# EAGLE board LB_BIT_w21_SUM-v03(2_1x) (EAGLE 6.5.0)

Size 299.64 x 153.09 mm. Coordinates in mm from the lower left corner, seen from the top.
Outline: 139.64,0 299.64,0 299.64,100 139.64,100 139.64,0
Copper layers (1*16): Top 0.035mm / dielectric 1.5mm / Bottom 0.035mm
Design rules "default": minimum track width 10mil, minimum drill 24mil, track to track 8mil, track to pad 8mil, pad to pad 8mil, via to via 8mil, smd to smd 8mil, copper to edge 40mil, drill to drill 8mil, minimum pad ring 10mil, minimum via ring 8mil, stop-mask expansion 4mil, vias tented up to drill 0mil, thermal gap 10mil

## Footprints (pad centres in the part's own frame; a part is rotated, then mirrored left to right if it is on the bottom)
BITSNAP_V03_FEMALE = drill 1: GND 3.91,3.33; SIG 6.45,3.33; VCC 8.99,3.33 | hole 1.4: 1.63,2.5; 11.27,2.5
BITSNAP_V03_MALE = drill 1: GND1 8.98,2.56; SIG1 6.44,2.56; VCC1 3.9,2.56 | hole 1.4: 11.27,2.5; 1.63,2.5
CAP-0603 = smd 1.1 x 1: 1 -0.85,0; 2 0.85,0
RES-0603 = smd 1.1 x 1: 1 -0.85,0; 2 0.85,0
SOD-923 = smd 0.4 x 0.5: 1 -0.5,0; 2 0.5,0
SOT23-5 = smd 0.55 x 1.2: 1 -0.95,-1.3; 2 0,-1.3; 3 0.95,-1.3; 4 0.95,1.3; 5 -0.95,1.3

## Placement (x,y rotation side)
FRAME1  FRAME-LETTER  [FABDWG01]  53.28,77.47 0 top
U$1  OSHWCREDIT  [OSHWCREDIT]  68.52,147.32 0 top
U$2  OSHW-LOGOL  [OSHW-LOGO-L]  -5.14,148.59 0 top  (outside the outline)
W21BSF1  BITSNAP_V03_FEMALE  [BITSNAP_V03_FEMALE]  109.16,148.59 0 top
W21BSM1  BITSNAP_V03_MALE  [BITSNAP_V03_MALE]  25.34,148.59 0 top
W21BSM2  BITSNAP_V03_MALE  [BITSNAP_V03_MALE]  3.75,148.59 0 top
W21C2  0.1u  [CAP-0603]  -41.97,147.32 0 top  (outside the outline)
W21C3  0.1u  [CAP-0603]  -45.78,147.32 0 top  (outside the outline)
W21C7  0.1u  [CAP-0603]  -49.59,147.32 0 top  (outside the outline)
W21R1  100k  [RES-0603]  -53.4,147.32 0 top  (outside the outline)
W21R4  100k  [RES-0603]  -57.21,147.32 0 top  (outside the outline)
W21R5  100k  [RES-0603]  124.4,170.18 0 top  (outside the outline)
W21R6  100k  [RES-0603]  120.59,170.18 0 top  (outside the outline)
W21R8  200k  [RES-0603]  116.78,170.18 0 top  (outside the outline)
W21R9  200k  [RES-0603]  112.97,170.18 0 top  (outside the outline)
W21R10  200k  [RES-0603]  109.16,170.18 0 top  (outside the outline)
W21R13  100k  [RES-0603]  105.35,170.18 0 top  (outside the outline)
W21TVS1  ESD9B5.0ST5G  [SOD-923]  -28,147.32 0 top  (outside the outline)
W21TVS2  ESD9B5.0ST5G  [SOD-923]  -33.08,147.32 0 top  (outside the outline)
W21TVS3  ESD9B5.0ST5G  [SOD-923]  -38.16,147.32 0 top  (outside the outline)
W21U1  LV321SOT23-5  [SOT23-5]  -12.76,147.32 0 top  (outside the outline)
W21U3  LV321SOT23-5  [SOT23-5]  -17.84,147.32 0 top  (outside the outline)
W21U5  LV321SOT23-5  [SOT23-5]  -22.92,147.32 0 top  (outside the outline)

## Library data of the parts
FRAME1 U$1 U$2 W21C2 W21C3 W21C7 W21R1 W21R4-W21R6 W21R8-W21R10 W21R13 W21U1 W21U3 W21U5 = LITTLEBITS
W21BSF1 W21BSM1 W21BSM2 = bitSnap
W21TVS1-W21TVS3 = LITTLEBITS; IEC_ESD_PROT: +/-18kV; LB_PN: ?; V_CLAMP: ?; V_OPERATION: 5V

## Nets
GND: W21BSF1.GND W21BSM1.GND1 W21BSM2.GND1 W21C2.2 W21C3.2 W21C7.2 W21R9.2 W21R10.2 W21R13.2 W21TVS1.1 W21TVS2.1 W21TVS3.1 W21U1.2 W21U3.2 W21U5.2
N$2: W21BSM2.SIG1 W21R4.2 W21TVS3.2
N$3: W21R1.1 W21R9.1 W21U1.1
N$4: W21R5.1 W21R6.1 W21U5.1
N$5: W21BSM1.SIG1 W21R1.2 W21TVS1.2
N$6: W21BSF1.SIG W21R8.1 W21TVS2.2 W21U5.4
N$8: W21R5.2 W21U1.3 W21U1.4
N$10: W21R4.1 W21R10.1 W21U3.1
N$11: W21R6.2 W21U3.3 W21U3.4
N$12: W21R8.2 W21R13.1 W21U5.3
VCC: W21BSF1.VCC W21BSM1.VCC1 W21BSM2.VCC1 W21C2.1 W21C3.1 W21C7.1 W21U1.5 W21U3.5 W21U5.5

## Tracks (layer width: path | path; a pad name or v marks a point on that pad's centre or on a via)
GND  (14 unrouted)
N$2  (2 unrouted)
N$3  (2 unrouted)
N$4  (2 unrouted)
N$5  (2 unrouted)
N$6  (3 unrouted)
N$8  (2 unrouted)
N$10  (2 unrouted)
N$11  (2 unrouted)
N$12  (2 unrouted)
VCC  (8 unrouted)